# EAGLE board node4-frontend (EAGLE 4.16)

Size 100 x 80 mm. Coordinates in mm from the lower left corner, seen from the top.
Outline: 0,0 100,0 100,80 0,80 0,0
Copper layers (1*16): Top 0.035mm / dielectric 1.5mm / Bottom 0.035mm
Design rules "default": minimum track width 10mil, minimum drill 24mil, track to track 8mil, track to pad 8mil, pad to pad 8mil, via to via 8mil, smd to smd 8mil, copper to edge 40mil, drill to drill 8mil, minimum pad ring 10mil, minimum via ring 8mil, stop-mask expansion 4mil, vias tented up to drill 0mil, thermal gap 10mil

## Footprints (pad centres in the part's own frame; a part is rotated, then mirrored left to right if it is on the bottom)
PAD_SQUARE_APC-FREE_0.1/028 = drill 0.711 pad 1.168 square: PAD 0,0
C0805 = smd 1.3 x 1.5: 1 -0.85,0; 2 0.85,0
C1206 = smd 1.6 x 1.8: 1 -1.4,0; 2 1.4,0
D/7343-31R = smd 2.55 x 2.7: + 3.175,0; - -3.175,0
CAN_NODE = drill 0.508 pad 1.016 round: B+@1 2,1.875; B+@2 0,1.875; B-@7 2,-1.875; B-@8 0,-1.875; CANH@3 2,0.625; CANH@4 0,0.625; CANL@5 2,-0.625; CANL@6 0,-0.625 | drill 1.511 round: CHASSIS@1 -2.032,4.636; CHASSIS@2 -2.032,-4.636
JST-16PS-JED = drill 0.508 pad 1.016 round: 1 4.375,-2; 2 4.375,0; 3 3.125,-2; 4 3.125,0; 5 1.875,-2; 6 1.875,0; 7 0.625,-2; 8 0.625,0; 9 -0.625,-2; 10 -0.625,0; 11 -1.875,-2; 12 -1.875,0; 13 -3.125,-2; 14 -3.125,0; 15 -4.375,-2; 16 -4.375,0
NMINIP2-J1 = smd 2 x 2: A 2,0; C -2,0
SOT23-3 = smd 0.7 x 1: 1 -0.95,-1.3; 2 0.95,-1.3; 3 0,1.3
0805-DIODE = smd 1.3 x 1.5: 1(ANODE) -0.85,0; 2(CATHODE) 0.85,0
0603-DIODE = smd 1 x 1.1: A -0.85,0; K 0.85,0
1206 = smd 1.6 x 1.8: 1 -1.4,0; 2 1.4,0
SD31 = smd 0.7 x 1.4: 1 -1.55,0; 2 1.55,0
CMS1 = smd 0.254 x 0.254: 1 3.708,-2.362; 2 3.708,2.362; 3 -3.708,2.362; 4 -3.708,-2.362
EXC-CET = smd 1.3 x 1.4: 1 -2.05,0; 2 2.05,0 | smd 1 x 1.4: C 0,-0.7
SOT23-6 = smd 0.7 x 1: 1 -0.95,-1.3; 2 0,-1.3; 3 0.95,-1.3; 4 0.95,1.3; 5 0,1.3; 6 -0.95,1.3
R0805 = smd 1.3 x 1.5: 1 -0.85,0; 2 0.85,0
M0805 = smd 1.3 x 1.6: 1 -0.95,0; 2 0.95,0
R1206 = smd 1.6 x 1.803: 1 -1.422,0; 2 1.422,0
SJ_2W = smd 1.27 x 2.54: 1 -2.54,0; 2 0,0; 3 2.54,0
SMB = smd 2.4 x 2.4: A 2.2,0; C -2.2,0
MSOP8 = smd 0.4 x 1.2: 1 -0.975,-2.05; 2 -0.325,-2.05; 3 0.325,-2.05; 4 0.975,-2.05; 5 0.975,2.05; 6 0.325,2.05; 7 -0.325,2.05; 8 -0.975,2.05
TQFP64-10X10 = smd 1.2 x 0.3: 1 -5.7,3.75; 2 -5.7,3.25; 3 -5.7,2.75; 4 -5.7,2.25; 5 -5.7,1.75; 6 -5.7,1.25; 7 -5.7,0.75; 8 -5.7,0.25; 9 -5.7,-0.25; 10 -5.7,-0.75; 11 -5.7,-1.25; 12 -5.7,-1.75; 13 -5.7,-2.25; 14 -5.7,-2.75; 15 -5.7,-3.25; 16 -5.7,-3.75; 33 5.7,-3.75; 34 5.7,-3.25; 35 5.7,-2.75; 36 5.7,-2.25; 37 5.7,-1.75; 38 5.7,-1.25; 39 5.7,-0.75; 40 5.7,-0.25; 41 5.7,0.25; 42 5.7,0.75; 43 5.7,1.25; 44 5.7,1.75; 45 5.7,2.25; 46 5.7,2.75; 47 5.7,3.25; 48 5.7,3.75 | smd 0.3 x 1.2: 17 -3.75,-5.7; 18 -3.25,-5.7; 19 -2.75,-5.7; 20 -2.25,-5.7; 21 -1.75,-5.7; 22 -1.25,-5.7; 23 -0.75,-5.7; 24 -0.25,-5.7; 25 0.25,-5.7; 26 0.75,-5.7; 27 1.25,-5.7; 28 1.75,-5.7; 29 2.25,-5.7; 30 2.75,-5.7; 31 3.25,-5.7; 32 3.75,-5.7; 49 3.75,5.7; 50 3.25,5.7; 51 2.75,5.7; 52 2.25,5.7; 53 1.75,5.7; 54 1.25,5.7; 55 0.75,5.7; 56 0.25,5.7; 57 -0.25,5.7; 58 -0.75,5.7; 59 -1.25,5.7; 60 -1.75,5.7; 61 -2.25,5.7; 62 -2.75,5.7; 63 -3.25,5.7; 64 -3.75,5.7
TSSOP-14 = smd 0.305 x 0.991: 1 -1.95,-2.918; 2 -1.3,-2.918; 3 -0.65,-2.918; 4 0,-2.918; 5 0.65,-2.918; 6 1.3,-2.918; 7 1.95,-2.918; 8 1.95,2.918; 9 1.3,2.918; 10 0.65,2.918; 11 0,2.918; 12 -0.65,2.918; 13 -1.3,2.918; 14 -1.95,2.918
ZJ-1206 = smd 1.6 x 1.803: 1 -1.422,0; 2 1.422,0
CS10 = smd 1.905 x 2.413: P$1 -2.235,0; P$2 2.235,0
CM415 = smd 1.118 x 1.905: P$1 -1.702,0; P$2 1.702,0

## Placement (x,y rotation side)
3P3  3P3  [PAD_SQUARE_APC-FREE_0.1/028]  -36.36,70.48 0 top  (outside the outline)
C200  22  [C0805]  -85.89,62.86 0 top  (outside the outline)
C201  10  [C1206]  -88.43,32.38 0 top  (outside the outline)
C202  0.1  [C0805]  -96.05,62.86 0 top  (outside the outline)
C203  22  [D/7343-31R]  -50.33,23.49 0 top  (outside the outline)
C204  0.33  [C0805]  -106.21,62.86 0 top  (outside the outline)
C205  TBD  [C0805]  -116.37,62.86 0 top  (outside the outline)
C206  TBD  [C0805]  -126.53,62.86 0 top  (outside the outline)
C208  TBD  [C0805]  -136.69,62.86 0 top  (outside the outline)
C209  10pF  [C0805]  -146.85,62.86 0 top  (outside the outline)
C210  0.1  [C0805]  -18.58,70.48 0 top  (outside the outline)
C250  2.7  [C0805]  -30.01,55.24 0 top  (outside the outline)
C251  0.015  [C0805]  -41.44,55.24 0 top  (outside the outline)
C252  TBD  [C0805]  -52.87,55.24 0 top  (outside the outline)
C252A  TBD  [C1206]  -77,32.38 0 top  (outside the outline)
C281  39 pF  [C0805]  -64.3,55.24 0 top  (outside the outline)
C282  33 pF  [C0805]  -75.73,55.24 0 top  (outside the outline)
C283  22 pF  [C0805]  -87.16,55.24 0 top  (outside the outline)
C284  22 pF  [C0805]  -98.59,55.24 0 top  (outside the outline)
C285  0.1  [C0805]  -110.02,55.24 0 top  (outside the outline)
C286  0.1  [C0805]  -121.45,55.24 0 top  (outside the outline)
C287  0.1  [C0805]  -132.88,55.24 0 top  (outside the outline)
C288  0.1  [C0805]  -144.31,55.24 0 top  (outside the outline)
C289  18pF  [C0805]  -18.58,62.86 0 top  (outside the outline)
C290  18pF  [C0805]  -30.01,62.86 0 top  (outside the outline)
C291  0.1  [C0805]  -41.44,62.86 0 top  (outside the outline)
C292  0.1  [C0805]  -52.87,62.86 0 top  (outside the outline)
C293  0.1  [C0805]  -64.3,62.86 0 top  (outside the outline)
C294  0.1  [C0805]  -75.73,62.86 0 top  (outside the outline)
CM200  USB  [CAN_NODE]  -36.36,9.52 0 top  (outside the outline)
CM201  JST-16PS-JED  [JST-16PS-JED]  -52.87,9.52 0 top  (outside the outline)
CR200  MA2Q705  [NMINIP2-J1]  -30.01,32.38 0 top  (outside the outline)
CR201  MMBD1501-TP  [SOT23-3]  -102.4,5.71 0 top  (outside the outline)
CR250  MA2Q705  [NMINIP2-J1]  -41.44,32.38 0 top  (outside the outline)
CR251  MA2Q705  [NMINIP2-J1]  -52.87,32.38 0 top  (outside the outline)
D201  LED-ORG-0805  [0805-DIODE]  -27.47,70.48 0 top  (outside the outline)
D281  LED-RED-0603  [0603-DIODE]  -140.5,93.34 0 top  (outside the outline)
D282  LED-GRN-  [0603-DIODE]  -149.39,93.34 0 top  (outside the outline)
F200  0.5A  [1206]  -99.86,32.38 0 top  (outside the outline)
L200A  47uH  [SD31]  -77,23.49 0 top  (outside the outline)
L200B  47uH  [SD31]  -88.43,23.49 0 top  (outside the outline)
L201  CMS1  [CMS1]  -89.7,5.71 0 top  (outside the outline)
L281  EXC-CET471U  [EXC-CET]  -137.96,23.49 0 top  (outside the outline)
L282  FILTER_EMI-EXC-CET  [EXC-CET]  -18.58,32.38 0 top  (outside the outline)
Q250  ZXMP6A17E6TA  [SOT23-6]  -112.56,5.71 0 top  (outside the outline)
Q251  BSS123E6327  [SOT23-3]  -122.72,5.71 0 top  (outside the outline)
Q282  BSS123E6327  [SOT23-3]  -132.88,5.71 0 top  (outside the outline)
R1  0  [R0805]  -116.37,40 0 top  (outside the outline)
R200  10.0k  [R0805]  -127.8,40 0 top  (outside the outline)
R201  17.4k  [R0805]  -139.23,40 0 top  (outside the outline)
R206  TBD  [R0805]  -18.58,47.62 0 top  (outside the outline)
R209  60.4k  [R0805]  -30.01,47.62 0 top  (outside the outline)
R210  10.0k  [R0805]  -41.44,47.62 0 top  (outside the outline)
R215  100k  [R0805]  -52.87,47.62 0 top  (outside the outline)
R241  649  [M0805]  -104.94,40 0 top  (outside the outline)
R250  61.9k  [R0805]  -64.3,47.62 0 top  (outside the outline)
R251  10.0k  [R0805]  -75.73,47.62 0 top  (outside the outline)
R252  0.82  [R0805]  -87.16,47.62 0 top  (outside the outline)
R253  47k  [R0805]  -98.59,47.62 0 top  (outside the outline)
R254  18.2k  [R0805]  -110.02,47.62 0 top  (outside the outline)
R255  10.0k  [R0805]  -121.45,47.62 0 top  (outside the outline)
R281  33.2  [R0805]  -132.88,47.62 0 top  (outside the outline)
R282  33.2  [R0805]  -144.31,47.62 0 top  (outside the outline)
R283  10.0k  [R1206]  -111.29,32.38 0 top  (outside the outline)
R284  10.0k  [R1206]  -122.72,32.38 0 top  (outside the outline)
R285  10.0k  [R1206]  -134.15,32.38 0 top  (outside the outline)
R286  10.0k  [R1206]  -145.58,32.38 0 top  (outside the outline)
R287  10.0k  [R1206]  -18.58,40 0 top  (outside the outline)
R288  10.0k  [R1206]  -30.01,40 0 top  (outside the outline)
R289  649  [R1206]  -41.44,40 0 top  (outside the outline)
R290  649  [R1206]  -52.87,40 0 top  (outside the outline)
R291  1.5k  [R0805]  -18.58,55.24 0 top  (outside the outline)
RA1  t24  [PAD_SQUARE_APC-FREE_0.1/028]  -45.25,70.48 0 top  (outside the outline)
RA2  t24  [PAD_SQUARE_APC-FREE_0.1/028]  -54.14,70.48 0 top  (outside the outline)
RA3  t24  [PAD_SQUARE_APC-FREE_0.1/028]  -63.03,70.48 0 top  (outside the outline)
RA4  Sensor (+)  [PAD_SQUARE_APC-FREE_0.1/028]  -71.92,70.48 0 top  (outside the outline)
RA5  t24  [PAD_SQUARE_APC-FREE_0.1/028]  -80.81,70.48 0 top  (outside the outline)
RA6  t24  [PAD_SQUARE_APC-FREE_0.1/028]  -89.7,70.48 0 top  (outside the outline)
RA7  t24  [PAD_SQUARE_APC-FREE_0.1/028]  -98.59,70.48 0 top  (outside the outline)
RA8  t24  [PAD_SQUARE_APC-FREE_0.1/028]  -107.48,70.48 0 top  (outside the outline)
RA9  t24  [PAD_SQUARE_APC-FREE_0.1/028]  -116.37,70.48 0 top  (outside the outline)
RA10  t24  [PAD_SQUARE_APC-FREE_0.1/028]  -125.26,70.48 0 top  (outside the outline)
RA11  t24  [PAD_SQUARE_APC-FREE_0.1/028]  -134.15,70.48 0 top  (outside the outline)
RA12  t24  [PAD_SQUARE_APC-FREE_0.1/028]  -143.04,70.48 0 top  (outside the outline)
RA13  t24  [PAD_SQUARE_APC-FREE_0.1/028]  -17.31,78.1 0 top  (outside the outline)
RA14  t24  [PAD_SQUARE_APC-FREE_0.1/028]  -26.2,78.1 0 top  (outside the outline)
RA15  t24  [PAD_SQUARE_APC-FREE_0.1/028]  -35.09,78.1 0 top  (outside the outline)
RA16  t24  [PAD_SQUARE_APC-FREE_0.1/028]  -43.98,78.1 0 top  (outside the outline)
RA17  t24  [PAD_SQUARE_APC-FREE_0.1/028]  -52.87,78.1 0 top  (outside the outline)
RA18  t24  [PAD_SQUARE_APC-FREE_0.1/028]  -61.76,78.1 0 top  (outside the outline)
RA19  t24  [PAD_SQUARE_APC-FREE_0.1/028]  -70.65,78.1 0 top  (outside the outline)
RA20  t24  [PAD_SQUARE_APC-FREE_0.1/028]  -79.54,78.1 0 top  (outside the outline)
RA21  t24  [PAD_SQUARE_APC-FREE_0.1/028]  -88.43,78.1 0 top  (outside the outline)
RA22  t24  [PAD_SQUARE_APC-FREE_0.1/028]  -97.32,78.1 0 top  (outside the outline)
RA23  t24  [PAD_SQUARE_APC-FREE_0.1/028]  -106.21,78.1 0 top  (outside the outline)
RA24  t24  [PAD_SQUARE_APC-FREE_0.1/028]  -115.1,78.1 0 top  (outside the outline)
RA25  t24  [PAD_SQUARE_APC-FREE_0.1/028]  -123.99,78.1 0 top  (outside the outline)
RA26  t24  [PAD_SQUARE_APC-FREE_0.1/028]  -132.88,78.1 0 top  (outside the outline)
RA27  t24  [PAD_SQUARE_APC-FREE_0.1/028]  -141.77,78.1 0 top  (outside the outline)
RA28  t24  [PAD_SQUARE_APC-FREE_0.1/028]  -150.66,78.1 0 top  (outside the outline)
RA29  t24  [PAD_SQUARE_APC-FREE_0.1/028]  -17.31,85.72 0 top  (outside the outline)
RA30  t24  [PAD_SQUARE_APC-FREE_0.1/028]  -26.2,85.72 0 top  (outside the outline)
RA31  t24  [PAD_SQUARE_APC-FREE_0.1/028]  -35.09,85.72 0 top  (outside the outline)
RA32  t24  [PAD_SQUARE_APC-FREE_0.1/028]  -43.98,85.72 0 top  (outside the outline)
RA33  t24  [PAD_SQUARE_APC-FREE_0.1/028]  -52.87,85.72 0 top  (outside the outline)
RA34  t24  [PAD_SQUARE_APC-FREE_0.1/028]  -61.76,85.72 0 top  (outside the outline)
RA35  t24  [PAD_SQUARE_APC-FREE_0.1/028]  -70.65,85.72 0 top  (outside the outline)
RA36  t24  [PAD_SQUARE_APC-FREE_0.1/028]  -79.54,85.72 0 top  (outside the outline)
RA37  t24  [PAD_SQUARE_APC-FREE_0.1/028]  -88.43,85.72 0 top  (outside the outline)
RA38  t24  [PAD_SQUARE_APC-FREE_0.1/028]  -97.32,85.72 0 top  (outside the outline)
RA39  t24  [PAD_SQUARE_APC-FREE_0.1/028]  -106.21,85.72 0 top  (outside the outline)
RA40  t24  [PAD_SQUARE_APC-FREE_0.1/028]  -115.1,85.72 0 top  (outside the outline)
RA41  t24  [PAD_SQUARE_APC-FREE_0.1/028]  -123.99,85.72 0 top  (outside the outline)
RA42  t24  [PAD_SQUARE_APC-FREE_0.1/028]  -132.88,85.72 0 top  (outside the outline)
RA43  t24  [PAD_SQUARE_APC-FREE_0.1/028]  -141.77,85.72 0 top  (outside the outline)
RA44  t24  [PAD_SQUARE_APC-FREE_0.1/028]  -150.66,85.72 0 top  (outside the outline)
RA45  t24  [PAD_SQUARE_APC-FREE_0.1/028]  -17.31,93.34 0 top  (outside the outline)
RA46  t24  [PAD_SQUARE_APC-FREE_0.1/028]  -26.2,93.34 0 top  (outside the outline)
RA47  t24  [PAD_SQUARE_APC-FREE_0.1/028]  -35.09,93.34 0 top  (outside the outline)
RA48  t24  [PAD_SQUARE_APC-FREE_0.1/028]  -43.98,93.34 0 top  (outside the outline)
RA49  t24  [PAD_SQUARE_APC-FREE_0.1/028]  -52.87,93.34 0 top  (outside the outline)
RA50  t24  [PAD_SQUARE_APC-FREE_0.1/028]  -61.76,93.34 0 top  (outside the outline)
RA51  t24  [PAD_SQUARE_APC-FREE_0.1/028]  -70.65,93.34 0 top  (outside the outline)
RA52  t24  [PAD_SQUARE_APC-FREE_0.1/028]  -79.54,93.34 0 top  (outside the outline)
RA53  t24  [PAD_SQUARE_APC-FREE_0.1/028]  -88.43,93.34 0 top  (outside the outline)
RA54  t24  [PAD_SQUARE_APC-FREE_0.1/028]  -97.32,93.34 0 top  (outside the outline)
RA55  t24  [PAD_SQUARE_APC-FREE_0.1/028]  -106.21,93.34 0 top  (outside the outline)
RA56  t24  [PAD_SQUARE_APC-FREE_0.1/028]  -115.1,93.34 0 top  (outside the outline)
RA57  t24  [PAD_SQUARE_APC-FREE_0.1/028]  -123.99,93.34 0 top  (outside the outline)
RA58  t24  [PAD_SQUARE_APC-FREE_0.1/028]  -132.88,93.34 0 top  (outside the outline)
SJ280  [SJ_2W]  -99.86,23.49 0 top  (outside the outline)
SJ281  [SJ_2W]  -113.83,23.49 0 top  (outside the outline)
TVS200  SMBJ18A  [SMB]  -64.3,23.49 0 top  (outside the outline)
U200  LT1767EMS8  [MSOP8]  -78.27,6.98 0 top  (outside the outline)
U250  MAX5902AAETT  [SOT23-6]  -143.04,5.71 0 top  (outside the outline)
U251  TLV3012AIDBVT  [SOT23-6]  -18.58,23.49 0 top  (outside the outline)
U280  LPC2148FBD64-S  [TQFP64-10X10]  -21.12,9.52 0 top  (outside the outline)
U281  CD4024BPWR  [TSSOP-14]  -68.11,6.98 0 top  (outside the outline)
U282  SN65220DBVR  [SOT23-6]  -28.74,23.49 0 top  (outside the outline)
U283  MCP130T-315I/TT  [SOT23-3]  -38.9,23.49 0 top  (outside the outline)
W280  JUMPER_ZEROOHM1206  [ZJ-1206]  -63.03,40 0 top  (outside the outline)
W281  JUMPER_ZEROOHM1206  [ZJ-1206]  -73.19,40 0 top  (outside the outline)
W282  JUMPER_ZEROOHM1206  [ZJ-1206]  -83.35,40 0 top  (outside the outline)
W283  JUMPER_ZEROOHM1206  [ZJ-1206]  -93.51,40 0 top  (outside the outline)
X281  12.0 MHz  [CS10]  -126.53,23.49 0 top  (outside the outline)
X282  32.768 kHz  [CM415]  -64.3,32.38 0 top  (outside the outline)

## Library data of the parts
3P3 CM200 D201 D281 D282 L201 L281 L282 RA1-RA58 U280 W280-W283 = psas_eagle_library
C200-C202 C204-C206 C208-C210 = discrete-smd-ipc
C203 R1 R200 R201 R206 R209 R210 R215 R241 R250-R255 R281-R291 = rcl
C250-C252 C252A C281-C294 CM201 CR201 L200A L200B Q250 Q251 Q282 SJ280 SJ281 U250 U251 U281-U283 X281 X282 = node4
CR200 CR250 CR251 F200 = custom
TVS200 = diode
U200 = custom-linear-technology

## Nets
A_3P3: R1.2 RA4.PAD SJ280.1 W280.2
A_3P3_CPU: C285.2 R1.1 U280.7
A_GND: C285.1 C293.1 RA9.PAD RA58.PAD U280.59 W281.2
B+: CM200.B+@1 CM200.B+@2 L201.1
B-: CM200.B-@7 CM200.B-@8 L201.4
BIN: F200.1 L201.2
BOOST: C202.2 CR201.3 U200.1
CHASSIS: CM200.CHASSIS@1 CM200.CHASSIS@2 R215.1
CPU_D+: C290.2 R281.2 U280.10
CPU_D-: C289.2 R282.2 U280.11
CPU_PGOOD: U250.5 U280.58
CPU_RESET\: CM201.7 RA42.PAD U280.57 U283.1
CPU_SPS_OFF: Q282.1 U280.17
CPU_VBAT: C294.1 SJ281.2 U280.49
CPU_VREF: C293.2 SJ280.2 U280.63
CPU_XTAL1: C281.2 U280.62 X281.P$1
CPU_XTAL2: C282.2 U280.61 U281.1 X281.P$2
D+: L281.2 R281.1 R291.1
D-: L282.2 R282.1
DEBUG11: CM201.12 RA52.PAD
DEBUG12: CM201.13 RA53.PAD
DEBUG13: CM201.14 RA54.PAD
DEBUG14: CM201.15 RA55.PAD
DEBUG15: CM201.16 RA56.PAD
EXT_VBAT: RA6.PAD SJ281.3
EXT_VREF: RA7.PAD SJ280.3
FB: C208.1 C209.2 R200.2 R201.1 U200.6
GND: C200.1 C201.1 C203.- C204.1 C205.1 C206.1 C209.1 C210.1 C250.1 C252.1 C252A.1 C281.1 C282.1 C283.1 C284.1 C286.2 C287.1 C288.2 C289.1 C290.1 C291.2 C292.2 C294.2 CM201.11 CR200.A D201.2(CATHODE) D281.K D282.K L201.3 Q251.2 Q282.2 R200.1 R210.1 R215.2 R251.1 R255.1 R287.1 R288.1 RA51.PAD RA57.PAD TVS200.A U200.4 U250.4 U251.2 U280.6 U280.18 U280.25 U280.42 U280.50 U281.2 U281.7 U283.3 W281.1 W283.2
I_SENSE: Q250.4 R252.1
IN+: C251.1 R254.1 R255.2 U251.3
IO_3P3: R291.2 W282.1
IO_GND: L281.C L282.C U282.2 U282.5 W283.1
LED200_A: D282.A R290.2
MAX_UVLO: Q282.3 R250.1 R251.2 U250.6
N_DRAIN: Q251.3 R253.1 U250.2
N_GATE: C251.2 Q251.1 U251.1
P0.0/TXD0/PWM1: CM201.1 RA36.PAD U280.19
P0.1/RXD0/PWM3/EINT0: CM201.3 RA38.PAD U280.21
P0.2/SCL0/CAP0.0: RA32.PAD U280.22
P0.3/SDA0/MAT0.0/EINT1: RA44.PAD U280.26
P0.4/SCK0/CAP0.1/AD0.6: RA31.PAD U280.27
P0.5/MISO0/MAT0.1/AD0.7: RA30.PAD U280.29
P0.6/MOSI0/CAP0.2/AD1.0: RA29.PAD U280.30
P0.7/SSEL0/PWM2/EINT2: RA19.PAD U280.31
P0.8/TXD1/PWM4/AD1.1: RA18.PAD U280.33
P0.9/RXD1/PWM6/EINT3: RA27.PAD U280.34
P0.10/RTS1/CAP1.0/AD1.2: RA17.PAD U280.35
P0.11/CTS1/CAP1.1/SCL1: RA16.PAD U280.37
P0.12/DSR1/MAT1.0/AD1.3: RA25.PAD U280.38
P0.13/DTR1/MAT1.1/AD1.4: RA15.PAD U280.39
P0.14/DCD1/EINT1/SDA1: RA14.PAD U280.41
P0.15/RI1/EINT2/AD1.5: RA13.PAD U280.45
P0.16/EINT0/MAT0.2/CAP0.2: RA22.PAD U280.46
P0.17/CAP1.2/SCK1/MAT1.2: RA12.PAD U280.47
P0.18/CAP1.3/MISO1/MAT1.3: RA11.PAD U280.53
P0.19/MAT1.2/MOSI1/CAP1.2: RA20.PAD U280.54
P0.20/MAT1.3/SSEL1/EINT3: RA10.PAD U280.55
P0.21/PWM5/AD1.6/CAP1.3: RA3.PAD U280.1
P0.22/AD1.7/CAP0.0/MAT0.0: RA2.PAD U280.2
P0.25/AD0.4/AOUT: RA35.PAD U280.9
P0.28/AD0.1/CAP0.2/MAT0.2: RA34.PAD U280.13
P0.29/AD0.2/CAP0.3/MAT0.3: RA46.PAD U280.14
P0.30/AD0.3/EINT3/CAP0.0: RA33.PAD U280.15
P1.16/TRACEPKT0: R290.1 RA45.PAD U280.16
P1.17/TRACEPKT1: R289.2 RA47.PAD U280.12
P1.18/TRACEPKT2: RA48.PAD U280.8
P1.19/TRACEPKT3: RA1.PAD U280.4
P1.20/TRACESYNC: RA21.PAD U280.48
P1.21/PIPESTAT0: RA23.PAD U280.44
P1.22/PIPESTAT1: RA24.PAD U280.40
P1.23/PIPESTAT2: RA26.PAD U280.36
P1.24/TRACECLK: RA28.PAD U280.32
P1.25/EXTIN0: RA43.PAD U280.28
P1.26/RTCK: CM201.4 R287.2 RA39.PAD U280.24
P1.27/TDO: CM201.9 R286.1 RA49.PAD U280.64
P1.28/TDI: CM201.8 R285.1 RA5.PAD U280.60
P1.29/TCK: CM201.6 R288.2 RA41.PAD U280.56
P1.30/TMS: CM201.5 R284.1 RA40.PAD U280.52
P1.31/TRST\: CM201.2 R283.1 RA37.PAD U280.20
P_GATE: Q250.3 U250.3
PIC_LAMP: D281.A R289.1
REF: U251.4 U251.5
RTXC1: C283.2 U280.3 X282.P$2
RTXC2: C284.2 U280.5 X282.P$1
SHDN\: C210.2 R209.1 R210.2 U200.5
SPS_3P3: 3P3.PAD C200.2 C208.2 C286.1 C287.2 C288.1 C291.1 C292.1 CM201.10 CR201.1 CR250.A L200B.2 R201.2 R241.2 R254.2 R283.2 R284.2 R285.2 R286.2 RA50.PAD SJ281.1 U280.23 U280.43 U280.51 U281.14 U283.2 W280.1 W282.2
SPS_3P3_LED: D201.1(ANODE) R241.1
SPS_5_BUCK_OUT: CR251.A L200A.2 L200B.1
SPS_5_REG: C252.2 C252A.2 CR251.C RA8.PAD
SPS_SYNC: U200.8 U281.9
USB+: CM200.CANH@3 CM200.CANH@4 L281.1 U282.6
USB-: CM200.CANL@5 CM200.CANL@6 L282.1 U282.4
V+: C250.2 CR250.C U251.6
VC: C205.2 R206.2 U200.7
VC_FLT: C206.2 R206.1
VIN: C201.2 R209.2 R252.2 R253.2 U200.2
VS: C203.+ C204.2 F200.2 Q250.1 Q250.2 Q250.5 Q250.6 R250.2 TVS200.C U250.1
VSW: C202.1 CR200.C L200A.1 U200.3

## Tracks (layer width: path | path; a pad name or v marks a point on that pad's centre or on a via)
A_3P3  (3 unrouted)
A_3P3_CPU  (2 unrouted)
A_GND  (5 unrouted)
B+  (2 unrouted)
B-  (2 unrouted)
BIN  (1 unrouted)
BOOST  (2 unrouted)
CHASSIS  (2 unrouted)
CPU_D+  (2 unrouted)
CPU_D-  (2 unrouted)
CPU_PGOOD  (1 unrouted)
CPU_RESET\  (3 unrouted)
CPU_SPS_OFF  (1 unrouted)
CPU_VBAT  (2 unrouted)
CPU_VREF  (2 unrouted)
CPU_XTAL1  (2 unrouted)
CPU_XTAL2  (3 unrouted)
D+  (2 unrouted)
D-  (1 unrouted)
DEBUG11  (1 unrouted)
DEBUG12  (1 unrouted)
DEBUG13  (1 unrouted)
DEBUG14  (1 unrouted)
DEBUG15  (1 unrouted)
EXT_VBAT  (1 unrouted)
EXT_VREF  (1 unrouted)
FB  (4 unrouted)
GND  (53 unrouted)
I_SENSE  (1 unrouted)
IN+  (3 unrouted)
IO_3P3  (1 unrouted)
IO_GND  (4 unrouted)
LED200_A  (1 unrouted)
MAX_UVLO  (3 unrouted)
N_DRAIN  (2 unrouted)
N_GATE  (2 unrouted)
P0.0/TXD0/PWM1  (2 unrouted)
P0.1/RXD0/PWM3/EINT0  (2 unrouted)
P0.2/SCL0/CAP0.0  (1 unrouted)
P0.3/SDA0/MAT0.0/EINT1  (1 unrouted)
P0.4/SCK0/CAP0.1/AD0.6  (1 unrouted)
P0.5/MISO0/MAT0.1/AD0.7  (1 unrouted)
P0.6/MOSI0/CAP0.2/AD1.0  (1 unrouted)
P0.7/SSEL0/PWM2/EINT2  (1 unrouted)
P0.8/TXD1/PWM4/AD1.1  (1 unrouted)
P0.9/RXD1/PWM6/EINT3  (1 unrouted)
P0.10/RTS1/CAP1.0/AD1.2  (1 unrouted)
P0.11/CTS1/CAP1.1/SCL1  (1 unrouted)
P0.12/DSR1/MAT1.0/AD1.3  (1 unrouted)
P0.13/DTR1/MAT1.1/AD1.4  (1 unrouted)
P0.14/DCD1/EINT1/SDA1  (1 unrouted)
P0.15/RI1/EINT2/AD1.5  (1 unrouted)
P0.16/EINT0/MAT0.2/CAP0.2  (1 unrouted)
P0.17/CAP1.2/SCK1/MAT1.2  (1 unrouted)
P0.18/CAP1.3/MISO1/MAT1.3  (1 unrouted)
P0.19/MAT1.2/MOSI1/CAP1.2  (1 unrouted)
P0.20/MAT1.3/SSEL1/EINT3  (1 unrouted)
P0.21/PWM5/AD1.6/CAP1.3  (1 unrouted)
P0.22/AD1.7/CAP0.0/MAT0.0  (1 unrouted)
P0.25/AD0.4/AOUT  (1 unrouted)
P0.28/AD0.1/CAP0.2/MAT0.2  (1 unrouted)
P0.29/AD0.2/CAP0.3/MAT0.3  (1 unrouted)
P0.30/AD0.3/EINT3/CAP0.0  (1 unrouted)
P1.16/TRACEPKT0  (2 unrouted)
P1.17/TRACEPKT1  (2 unrouted)
P1.18/TRACEPKT2  (1 unrouted)
P1.19/TRACEPKT3  (1 unrouted)
P1.20/TRACESYNC  (1 unrouted)
P1.21/PIPESTAT0  (1 unrouted)
P1.22/PIPESTAT1  (1 unrouted)
P1.23/PIPESTAT2  (1 unrouted)
P1.24/TRACECLK  (1 unrouted)
P1.25/EXTIN0  (1 unrouted)
P1.26/RTCK  (3 unrouted)
P1.27/TDO  (3 unrouted)
P1.28/TDI  (3 unrouted)
P1.29/TCK  (3 unrouted)
P1.30/TMS  (3 unrouted)
P1.31/TRST\  (3 unrouted)
P_GATE  (1 unrouted)
PIC_LAMP  (1 unrouted)
REF  (1 unrouted)
RTXC1  (2 unrouted)
RTXC2  (2 unrouted)
SHDN\  (3 unrouted)
SPS_3P3  (27 unrouted)
SPS_3P3_LED  (1 unrouted)
SPS_5_BUCK_OUT  (2 unrouted)
SPS_5_REG  (3 unrouted)
SPS_SYNC  (1 unrouted)
USB+  (3 unrouted)
USB-  (3 unrouted)
V+  (2 unrouted)
VC  (2 unrouted)
VC_FLT  (1 unrouted)
VIN  (4 unrouted)
VS  (9 unrouted)
VSW  (3 unrouted)